# Altium PCB TK530_Kraftbakplan.PcbDoc
Units mm, origin at the board's own origin, x right, y up, seen from the top; angles counter-clockwise.
Board outline 200 x 100 mm, 2 copper layers (Top Layer, Bottom Layer), stack 3.071 mm thick; 35 components, 37 nets, 226 pads, 21 vias.
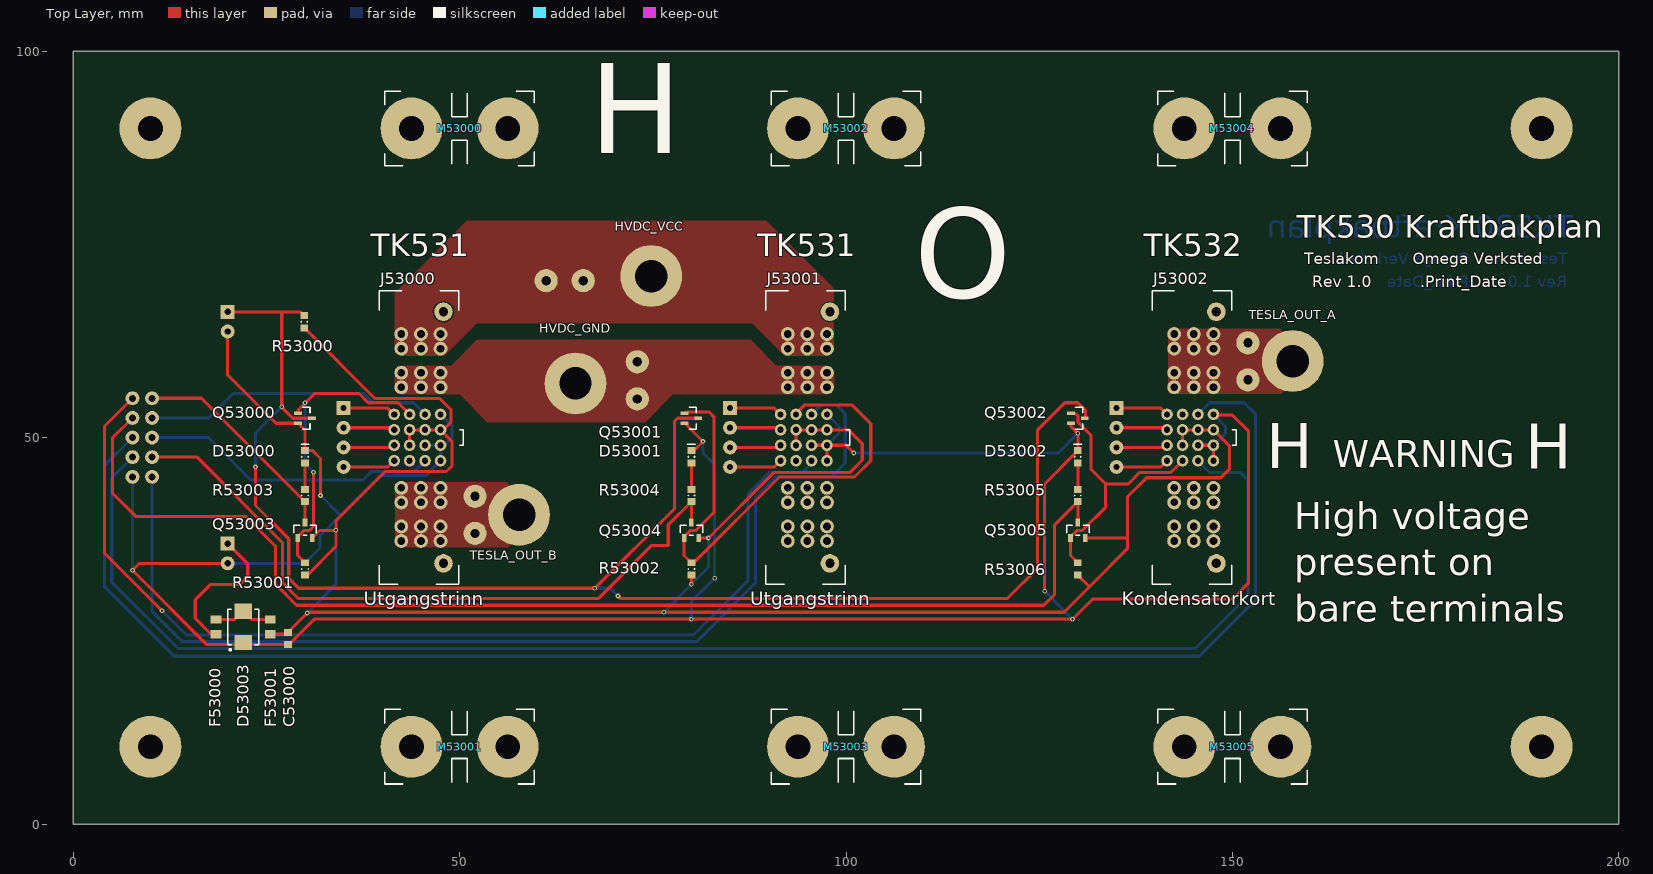
[diagram p0: Top Layer view]
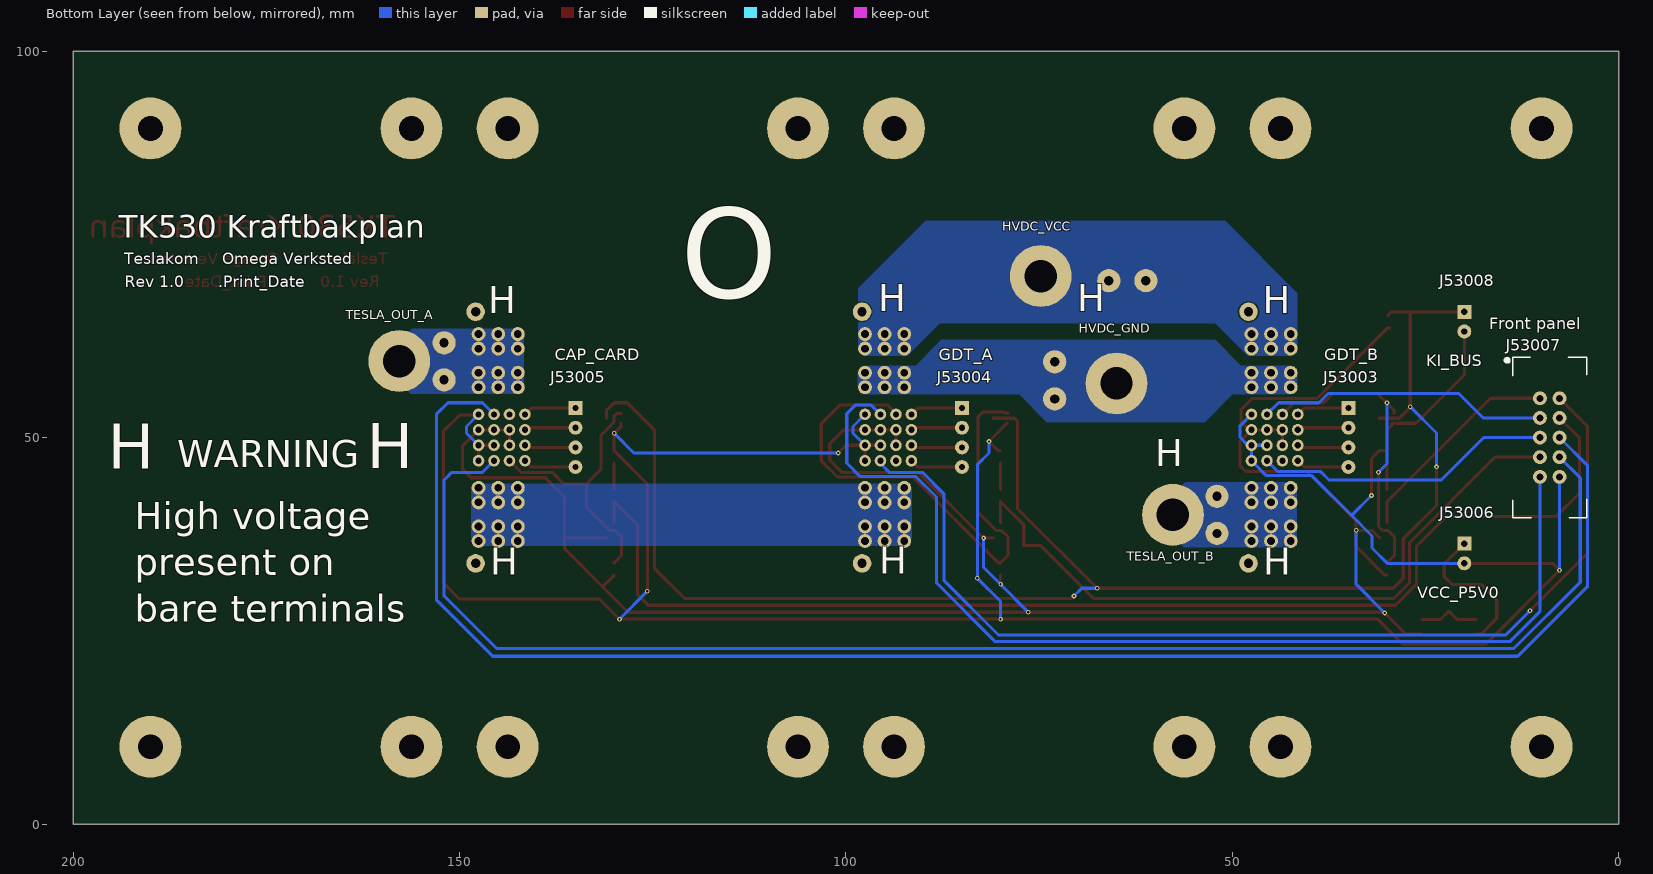
[diagram p1: Bottom Layer view, seen from below]
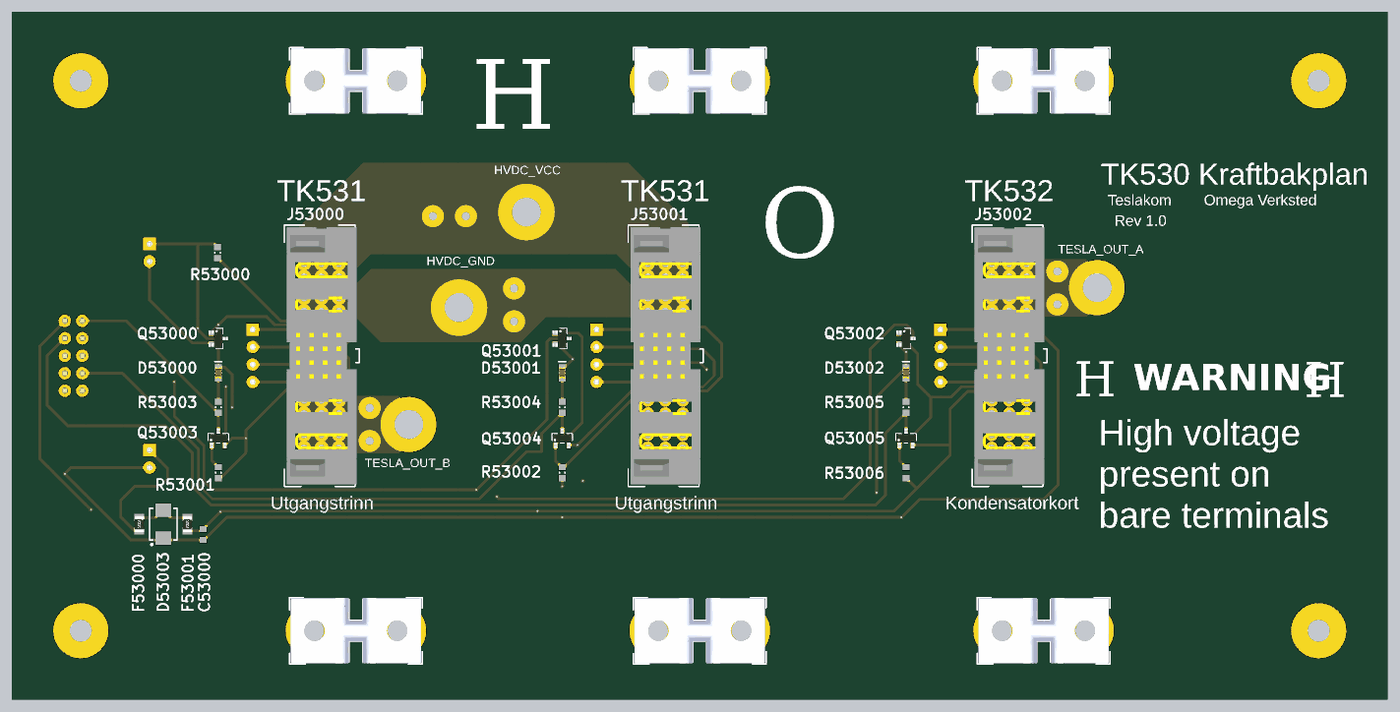
[diagram p2: 3D render of the assembled board from above, using the file's embedded part models]
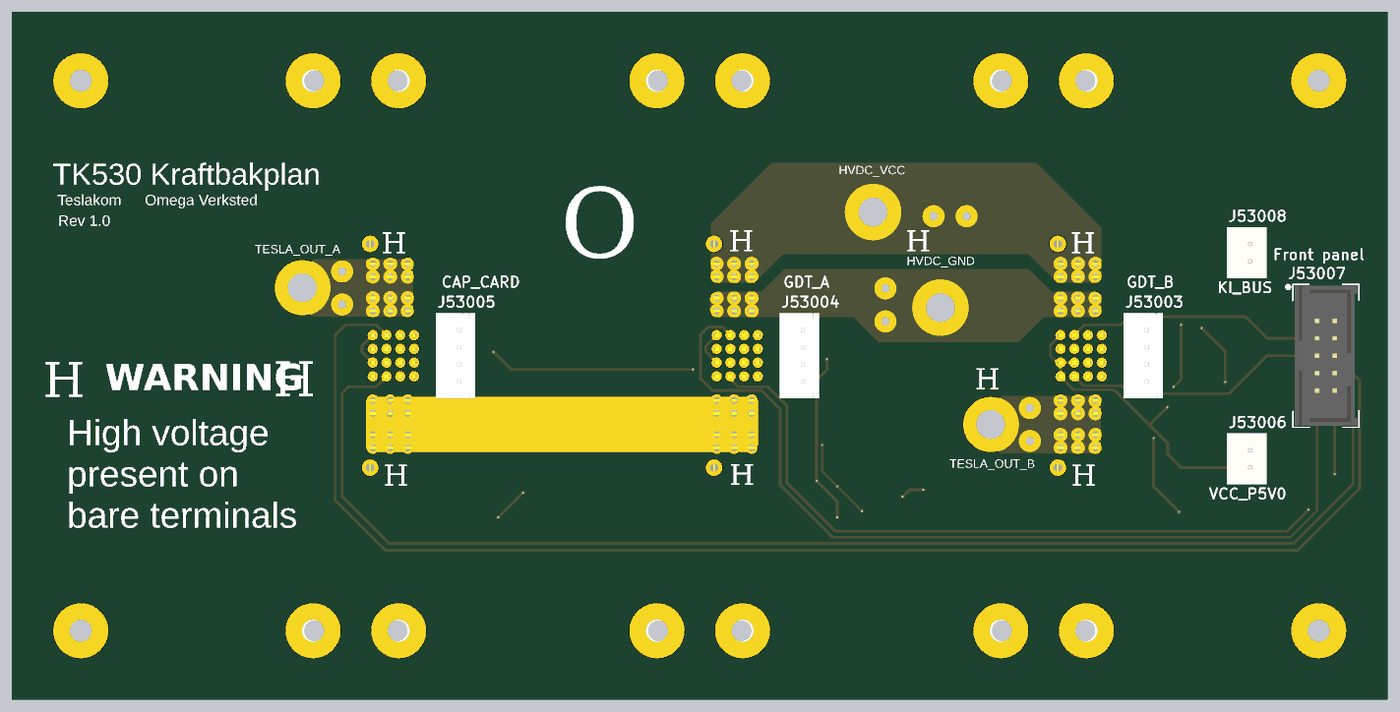
[diagram p3: 3D render of the assembled board from below, using the file's embedded part models]

## Layer stack, top to bottom
Top Solder: solder mask 0.0102, Solder Resist, Dk 3.5
Top Layer: signal copper 0.0356
Dielectric 1: dielectric 3, FR-4, Dk 4.8
Bottom Layer: signal copper 0.0356
Bottom Solder: solder mask 0.0102, Solder Resist, Dk 3.5

## Board outline
0,0 0,100 200,100 200,0 0,0

## Design rules (kind name [scope] priority, off if disabled: settings)
Clearance [All] p1: gap=0.16 ignorepadtopadclearanceinfootprint=FALSE except(0: Arc-Text Arc-Hole Track-Text Track-Hole SMDPad-Text SMDPad-Hole THPad-Text THPad-Hole Via-Text Via-Hole Fill-Text Fill-Hole Poly-Text Poly-Hole Region-Text Region-Hole Text-Text Text-Hole)
Height [All] p1: minheight=0 maxheight=200 prefheight=12.7
HoleSize [All] p1: absolutevalues=TRUE maxlimit=6.35 minlimit=0.3 maxpercent=80.000 minpercent=20.000
MinimumSolderMaskSliver [All] p1: minsoldermaskwidth=0.1
PlaneClearance [All] p1: clearance=1
PlaneConnect [All] p1: planeconnectstyle=Relief reliefexpansion=0.508 reliefentries=4 reliefconductorwidth=1 reliefairgap=0.254
PolygonConnect [All] p1: connectstyle=Direct reliefconductorwidth=0.254 reliefentries=4 polygonreliefangle="90 Angle" airgapwidth=0.254
RoutingVias [All] p1: holewidth=0.711 width=1.27 viastyle="Through Hole" minholewidth=0.711 minwidth=1.27 maxholewidth=0.711 maxwidth=1.27
SilkToSolderMaskClearance [IsPad] p1: minsilkscreentomaskgap=0.178 clearancetoexposedcopper=TRUE
SolderMaskExpansion [All] p1: expansion=0.102 istentingtop=FALSE
Width [All] p1: maxlimit=10 minlimit=0.16 preferedwidth=0.4
24 further rules are at their usual default settings.

## Components (designator, comment, footprint, x,y, rotation, side; value= is the part's Value field where it differs from the comment)
C53000 "100nF" CAPC0603(1608)55_N 27.8,24 r90 top
D53000 "SMD LED Red" I_LEDC0603(1608)_N 30,47.5 r90 top
D53001 "SMD LED Red" I_LEDC0603(1608)_N 80,47.5 r90 top
D53002 "SMD LED Red" I_LEDC0603(1608)_N 130,47.5 r90 top
D53003 "SMBJ5.0A-TR" SODFL535X245-2N 22,25.5 r90 top
F53000 "MC36214" RESC0805(2012)_N 18.5,25.5 r90 top
F53001 "MC36214" RESC0805(2012)_N 25.5,25.5 r270 top
J53000 "MPXX-02-16-02" MPSC-02-16-02-7.70-03-L-V-LC 45,50 r0 top
J53001 "MPXX-02-16-02" MPSC-02-16-02-7.70-03-L-V-LC 95,50 r0 top
J53002 "MPXX-02-16-02" MPSC-02-16-02-7.70-03-L-V-LC 145,50 r0 top
J53003 "B4B-XH-A (LF)(SN)" JST_4P 35,50 r0 bottom
J53004 "B4B-XH-A (LF)(SN)" JST_4P 85,50 r0 bottom
J53005 "B4B-XH-A (LF)(SN)" JST_4P 135,50 r0 bottom
J53006 "B2B-XH-A (LF)(SN)" JST_2P 20,35 r0 bottom
J53007 "Header2x5" HDRV10W64P254_2X5_2030X900X900B 8.95,50 r180 bottom
J53008 "B2B-XH-A (LF)(SN)" JST_2P 20,65 r0 bottom
M53000 "CardHolder" CardHolder900X1900X5000 50,90 r90 top
M53001 "CardHolder" CardHolder900X1900X5000 50,10 r90 top
M53002 "CardHolder" CardHolder900X1900X5000 100,90 r90 top
M53003 "CardHolder" CardHolder900X1900X5000 100,10 r90 top
M53004 "CardHolder" CardHolder900X1900X5000 150,90 r90 top
M53005 "CardHolder" CardHolder900X1900X5000 150,10 r90 top
Q53000 "2N7002" SOT323_N 30,52.5 r90 top
Q53001 "2N7002" SOT323_N 80,52.5 r90 top
Q53002 "2N7002" SOT323_N 130,52.5 r90 top
Q53003 "BSH201" SOT23-3_N 30,38 r180 top
Q53004 "BSH201" SOT23-3_N 80,38 r180 top
Q53005 "BSH201" SOT23-3_N 130,38 r180 top
R53000 "10k" RESC0603(1608)_N 29.9,65 r270 top
R53001 "10k" RESC0603(1608)_N 30,33 r270 top
R53002 "10k" RESC0603(1608)_N 80,33 r270 top
R53003 "47R" RESC0603(1608)_N 30,42.5 r270 top
R53004 "47R" RESC0603(1608)_N 80,42.5 r270 top
R53005 "47R" RESC0603(1608)_N 130,42.5 r270 top
R53006 "10k" RESC0603(1608)_N 130,33 r270 top

## Footprints (in the part's own frame and the unit in brackets; to place one, negate y for a bottom-side part, rotate by r counter-clockwise, add the part's x,y. Pads: shape width x height; smd on the part's side, far side on the other; paste and mask are expansions set on the pad)
CAPC0603(1608)55_N [mm] "Chip Capacitor, Body 1.6x0.8mm, Height 0.55mm, IPC Medium Density"
  rect 0.9x1 smd: 1(-0.8,0) 2(0.8,0)
  body extent -0.87,-0.48 0.88,0.47, height 0.55
CardHolder900X1900X5000 [mm]
  round 8 hole 3.2: 0(0,6.223) 0(0,-6.223)
  silkscreen extent -4.83,-9.65 4.83,9.65, body extent -4.75,-9.5 4.75,9.5, height 50
HDRV10W64P254_2X5_2030X900X900B [mm]
  round 1.8 hole 0.9: 1(-1.27,5.08) 2(1.27,5.08) 3(-1.27,2.54) 4(1.27,2.54) 5(-1.27,0) 6(1.27,0) 7(-1.27,-2.54) 8(1.27,-2.54) 9(-1.27,-5.08) 10(1.27,-5.08)
  silkscreen extent -5.7,-10.4 4.8,10.4, body extent -4.57,-10.16 4.57,10.16, height 9.86
I_LEDC0603(1608)_N [mm] "Chip Resistor, Body 1.6x0.8mm, IPC Medium Density"
  rect 0.9x1 smd: 1(-0.8,0) 2(0.8,0)
  silkscreen extent -0.05,-0.51 1.65,0.51, body extent -0.85,-0.45 0.85,0.45, height 0.9
JST_2P [mm]
  rect 1.8x1.8 hole 0.8: 1(0,-1.27)
  round 1.8 hole 0.8: 2(0,1.27)
  body extent -2.4,-3.7 3.35,3.7, height 7
JST_4P [mm]
  rect 1.8x1.8 hole 0.8: 1(0,-3.81)
  round 1.8 hole 0.8: 2(0,-1.27) 3(0,1.27) 4(0,3.81)
  body extent -2.35,-6.2 3.4,6.2, height 7
MPSC-02-16-02-7.70-03-L-V-LC [mm] "SAMTEC"
  round 2.4 hole 1.2 unplated: 0(2.92,-16.275) 0(2.92,16.275)
  round 1.8 hole 1: 1(-2.54,11.505) 1(-2.54,13.385) 1(0,11.505) 1(0,13.385) 1(2.54,11.505) 1(2.54,13.385) 2(-2.54,6.505) 2(-2.54,8.385) 2(0,6.505) 2(0,8.385) 2(2.54,6.505) 2(2.54,8.385) 3(-2.54,-8.385) 3(-2.54,-6.505) 3(0,-8.385) 3(0,-6.505) 3(2.54,-8.385) 3(2.54,-6.505) 4(-2.54,-13.385) 4(-2.54,-11.505) 4(0,-13.385) 4(0,-11.505) 4(2.54,-13.385) 4(2.54,-11.505)
  round 1.5 hole 0.8: 5(2.54,3) 6(2.54,1) 7(2.54,-1) 8(2.54,-3) 9(0.54,3) 10(0.54,1) 11(0.54,-1) 12(0.54,-3) 13(-1.46,3) 14(-1.46,1) 15(-1.46,-1) 16(-1.46,-3) 17(-3.46,3) 18(-3.46,1) 19(-3.46,-1) 20(-3.46,-3)
  silkscreen extent -5.4,-19 5.5,19, body extent -5.08,-18.72 5.08,18.72, height 10.24
RESC0603(1608)_N [mm] "Chip Resistor, Body 1.6x0.8mm, IPC Medium Density"
  rect 0.9x1 smd: 1(-0.8,0) 2(0.8,0)
  silkscreen extent -0.05,-0.4 0.05,0.4, body extent -0.85,-0.47 0.85,0.47, height 0.6
RESC0805(2012)_N [mm] "Chip Resistor, Body 2.0x1.3mm, IPC Medium Density"
  rect 1.05x1.4 smd: 1(-0.95,0) 2(0.95,0)
  body extent -1.15,-0.67 1.15,0.68, height 0.76
SODFL535X245-2N [mm] "SODFL, 2-Leads, Body 3,63x5,35mm, IPC Medium Density"
  rect 1.95x2.25 smd: 1(-2.025,0) 2(2.025,0)
  silkscreen extent -3.07,-2 2.3,2, body extent -2.3,-1.97 2.3,1.97, height 2.45
SOT23-3_N [mm] "SOT23, 3-Leads, Body 1.3x2.9mm, Pitch 0.95mm"
  rect 0.6x1 smd paste-0.05: 1(0.95,1) 2(-0.95,1) 3(0,-1)
  silkscreen extent -1.45,-0.65 1.45,0.65, body extent -1.45,-1.4 1.45,1.4, height 1.3
SOT323_N [mm] "SOT23, 3-Leads, Body 1.3x2.9mm, Pitch 0.95mm"
  rect 0.5x1 smd paste-0.05: 1(0.65,0.9) 2(-0.65,0.9) 3(0,-0.9)
  silkscreen extent -1.45,-0.65 1.45,0.3, body extent -1.45,-1.4 1.45,1.4, height 1.3

## Part data
C53000: library part 5152, "X7R 50V 5%", antall=1000, dybde=0, hylle=0, id=5152, komponenttype=2, lager_type=Baklager, leverandor=Farnell, leverandor_varenr=1759122, navn=100nF, nokkelord="Kondensator, Capacitor, CAP", pakke_opprettet="18/02/2015 14:18:13", pakke_opprettet_av=815, pakketype=0603, pris=1, produsent=Multicomp, rad=21, rom=OV, symbol_opprettet="14/11/2014 20:19:34", symbol_opprettet_av=815
D53000 D53001 D53002: library part 5143, "SMD", antall=50, dybde=2, hylle=6, id=5143, komponenttype=9, lager_type=Fremlager, leverandor=Farnell, leverandor_varenr=8554641, navn="SMD LED Red", nokkelord=SMD, pakke_opprettet="06/07/2014 18:55:44", pakke_opprettet_av=815, pakketype=0603, pris=1, produsent=Avago, rad=0, rom=OV, symbol_opprettet="06/07/2014 18:59:47", symbol_opprettet_av=815
D53003: library part 5314, "Transient Voltage Suppressor, TVS, Transil SMBJ Series, Unidirectional, 5 V, SMD, 2, 6.4 V", id=5314, komponenttype=9, leverandor=Farnell, leverandor_varenr=9886311, navn=SMBJ5.0A-TR, pakke_opprettet="14/03/2016 19:17:15", pakke_opprettet_av=815, pakketype=SMD, pris=1, produsent="ST Microelectronics", symbol_opprettet="28/06/2014 15:19:53", symbol_opprettet_av=815
F53000 F53001: library part 5311, "FUSE, PTC RESET, SMD, 16V, 500MA", id=5311, leverandor=Farnell, leverandor_varenr=1861181, navn=MC36214, pakke_opprettet="27/01/2016 14:23:16", pakke_opprettet_av=815, pakketype=0805, pris=2, produsent=Multicomp, symbol_opprettet="11/03/2016 15:38:25", symbol_opprettet_av=815
J53000 J53001 J53002: library part 3220, "SAMTEC Connector", id=3220, komponenttype=11, leverandor=Mouser, leverandor_varenr=MPSC-02-16-02-7.70-03-L-V-LC, navn=MPSC-02-16-02-7.70-03-L-V-LC, nokkelord="Kan kjøpes rett fra SAMTEC", pakke_opprettet="13/07/2014 16:35:38", pakke_opprettet_av=815, pakketype=TH, pris=30, produsent=SAMTEC, symbol_opprettet="13/07/2014 16:35:21", symbol_opprettet_av=815
J53003 J53004 J53005: library part 3046, "JST 4pin (pris pr. stk.)", antall=94, dybde=0, hylle=6, id=3046, komponenttype=11, lager_type=Fremlager, leverandor=Farnell, leverandor_varenr=1516278, navn="B4B-XH-A (LF)(SN)", nokkelord="Connector, Kontakt", pakke_opprettet="28/06/2014 18:25:23", pakke_opprettet_av=815, pakketype=TH, pris=2, produsent=JST, rad=3, rom=OV, symbol_opprettet="28/06/2014 15:33:28", symbol_opprettet_av=815
J53006 J53008: library part 4043, "JST 2pin (pris pr. stk.)", antall=120, dybde=0, hylle=6, id=4043, komponenttype=11, lager_type=Fremlager, leverandor=Farnell, leverandor_varenr=1516276, navn="B2B-XH-A (LF)(SN)", nokkelord="Connector, Kontakt", pakke_opprettet="28/06/2014 18:25:03", pakke_opprettet_av=815, pakketype=TH, pris=2, produsent=JST, rad=3, rom=OV, symbol_opprettet="28/06/2014 15:33:17", symbol_opprettet_av=815
J53007: library part 3224, "Header", id=3224, komponenttype=11, leverandor=Farnell, leverandor_varenr=2215304, navn="Header 2X5 Shrouded", nokkelord=Header, pakke_opprettet="12/07/2014 17:42:52", pakke_opprettet_av=815, pakketype=TH, pris=5, produsent=Amphenol, symbol_opprettet="13/11/2014 11:03:55", symbol_opprettet_av=815
M53000 M53001 M53002 M53003 M53004 M53005: library part 4028, "Støtter kort i bakplan", id=4028, navn="KortStøtte 50mm", nokkelord="support, cardholder, kortholder", pakke_opprettet="25/03/2017 04:47:31", pakke_opprettet_av=815, pakketype=TH, pris=5, symbol_opprettet="12/07/2014 20:29:53", symbol_opprettet_av=815
Q53000 Q53001 Q53002: library part 3075, "N-Channel MOSFET 300mA", antall=810, dybde=0, hylle=3, id=3075, komponenttype=4, lager_type=Fremlager, leverandor=Farnell, leverandor_varenr=1829184, navn=2N7002, pakke_opprettet="12/05/2018 20:42:12", pakke_opprettet_av=1165, pakketype=SOT-323, pris=1, rad=2, rom=OV, symbol_opprettet="11/07/2014 23:17:04", symbol_opprettet_av=774
Q53003 Q53004 Q53005: library part 3085, "P-Channel MOSFET 300mA", antall=51, dybde=0, hylle=3, id=3085, komponenttype=4, lager_type=Fremlager, leverandor=Farnell, leverandor_varenr=1758073, navn=BSH201, pakke_opprettet="08/07/2014 20:37:25", pakke_opprettet_av=815, pakketype=SOT, pris=3, produsent="NXP Semiconductors", rad=3, rom=OV, Status=New, symbol_opprettet="14/09/2016 17:47:57", symbol_opprettet_av=1150
R53000 R53001 R53002 R53006: library part 5264, "0.1W 1% Thick film resistor", antall=4, dybde=72, hylle=2, id=5264, komponenttype=1, lager_type=Fremlager, leverandor=Farnell, leverandor_varenr=2447230, navn=10k, nokkelord="Resistor Motstand", pakke_opprettet="08/07/2014 21:15:30", pakke_opprettet_av=815, pakketype=0603, pris=0, produsent=Multicomp, rad=0, rom=OV, symbol_opprettet="08/07/2014 21:16:33", symbol_opprettet_av=815
R53003 R53004 R53005: library part 4889, "0.1W 1% Thick film resistor", antall=195, dybde=16, hylle=2, id=4889, komponenttype=1, lager_type=Fremlager, leverandor=Farnell, leverandor_varenr=2447378, navn=47R, nokkelord=Resistor, pakke_opprettet="08/07/2014 21:15:30", pakke_opprettet_av=815, pakketype=0603, pris=0, produsent=Multicomp, rad=0, rom=OV, symbol_opprettet="08/07/2014 21:16:33", symbol_opprettet_av=815

## Free pads (board coordinates)
  round 8 hole 3.2 unplated: 0(10,10) 0(10,90) 0(190,10) 0(190,90)
  round 3 hole 1.2: 1(52,37.6) 1(52,42.4) 1(61.2,70.3) 1(66,70.3) 1(73,55) 1(73,59.8) 1(152,57.463) 1(152,62.263)
  round 8 hole 4.2: 1(57.7,40) 1(65,57) 1(74.8,70.9) 2(157.8,59.9)

## Via types
v1: diameter 0.6, hole 0.3, Top Layer to Bottom Layer, tented both sides, 21 vias

## Nets (pads, with @x,y where several pads share a name; then routed paths per layer and width w, separated by ;. In a path a pad name is that pad's centre, name@x,y a point inside that pad or via, vN(x,y) a via of type N, cw(c..) or ccw(c..) an arc to the next point about the centre after c; other vN are vias at no path point)
GDT_A1: J53000.18 J53003.2 | length 6.7
  Top Layer w0.4: J53003.2 41.27,51.27 J53000.18
GDT_A2: J53000.20 J53003.4 | length 6.9
  Top Layer w0.4: J53003.4 40.73,46.19 J53000.20
GDT_A3: J53001.18 J53004.2 | length 6.7
  Top Layer w0.4: J53004.2 91.27,51.27 J53001.18
GDT_A4: J53001.20 J53004.4 | length 6.9
  Top Layer w0.4: J53004.4 90.73,46.19 J53001.20
GDT_B1: J53000.17 J53003.1 | length 6.9
  Top Layer w0.4: J53003.1 40.73,53.81 J53000.17
GDT_B2: J53000.19 J53003.3 | length 6.7
  Top Layer w0.4: J53003.3 41.27,48.73 J53000.19
GDT_B3: J53001.17 J53004.1 | length 6.9
  Top Layer w0.4: J53004.1 90.73,53.81 J53001.17
GDT_B4: J53001.19 J53004.3 | length 6.7
  Top Layer w0.4: J53004.3 91.27,48.73 J53001.19
GND: C53000.1 D53000.2 D53001.2 D53002.2 D53003.1 J53000.5 J53000.7 J53000.8 J53000.11 J53001.5 J53001.7 J53001.8 J53001.11 J53002.5 J53002.7 J53002.8 J53002.11 J53006.2 J53007.10 J53008.2 Q53000.2 Q53001.2 Q53002.2 | length 388.5
  Top Layer w0.4: J53006.2 8.59,33.73 v1(7.68,32.82) 17.3,23.2 27.9,23.2 31.2,26.5 v1(80,26.5) v1(129.3,26.5) 131.9,29.1 150,29.1 152.1,31.2 152.1,50.8 150,52.9 147.64,52.9 J53002.5 ; J53008.2 20,58.1 26.25,51.85 Q53000.2@28.7,51.85 ; Q53000.2 29.35,51.85 29.4,51.8 29.4,51.55 30,50.95 D53000.2 31,48.3 32,47.3 v1(32,42.5) ; Q53001.2@79.125,51.875 v1(81.5,49.5) 80.3,48.3 D53001.2 ; J53001.11 J53001.7 ; J53001.8 J53001.7 ; v1(101,48) 100,49 J53001.7 ; v1(125.7,30.1) 125.7,44 D53002.2 v1(130,50.55) 129.1,51.45 Q53002.2 ; J53002.11 J53002.7 J53002.8
  Bottom Layer w0.4: v1(7.68,32.82) J53007.10 ; J53006.2 29.97,33.73 31.94,35.7 31.94,37.278 ; 32,37.338 34.6,39.938 ; v1(32,42.5) 34.562,39.938 34.6,39.938 ; J53000.11 J53000.7 ; J53000.5 49,51.54 49,50 48,49 J53000.7 ; v1(80,26.5) 80,28.8 v1(83,31.8) 83,46.5 81.5,48 v1(81.5,49.5) ; J53001.7 99.1,50.56 99.1,51.44 J53001.5 ; v1(101,48) 127.45,48 v1(130,50.55) ; v1(125.7,30.1) v1(129.3,26.5) ; J53002.7 149.1,50.56 149.1,51.44 J53002.5 ; 34.6,39.938 39.732,45.07 45.61,45.07 J53000.8 J53000.7
HVDC_GND: J53000.2 J53001.2 pad.1@65,57 pad.1@73,55 pad.1@73,59.8
HVDC_VCC: J53000.1 J53001.1 pad.1@61.2,70.3 pad.1@66,70.3 pad.1@74.8,70.9
KORT_INNSATT: J53008.1 Q53000.3 Q53001.3 Q53002.3 R53000.1 | length 208.2
  Top Layer w0.4: J53008.1 27,66.27 ; v1(23.6,46.2) 23.6,41.2 27.9,36.9 27.9,31.8 29.2,30.5 v1(67.5,30.5) 77.8,40.8 77.8,52.1 78.2,52.5 Q53001.3@81,52.5 ; R53000.1 29.43,66.27 27,66.27 ; Q53000.3@31,52.5 28.4,52.5 27,53.9 v1(27,54) 27,66.27 ; v1(70.5,29.5) 70.8,29.2 120.9,29.2 124.8,33.1 124.8,51 128.3,54.5 130,54.5 131,53.5 Q53002.3@131,52.5
  Bottom Layer w0.4: v1(23.6,46.2) 23.6,50.6 v1(27,54) ; v1(67.5,30.5) 69.5,30.5 v1(70.5,29.5)
NetD53000_1: D53000.1 R53003.1 | length 3.4
  Top Layer w0.4: R53003.1 D53000.1
NetD53001_1: D53001.1 R53004.1 | length 3.4
  Top Layer w0.4: R53004.1 D53001.1
NetD53002_1: D53002.1 R53005.1 | length 3.4
  Top Layer w0.4: R53005.1 D53002.1
NetD53003_2: D53003.2 F53000.2 F53001.1 | length 7.9
  Top Layer w0.4: F53000.2 20.925,26.45 D53003.2 23.075,26.45 F53001.1
NetF53000_1: F53000.1 J53006.1 | length 19.3
  Top Layer w0.4: F53000.1 17.85,24.55 15.8,26.6 15.8,29 17.8,31 21.6,31 22.6,32 22.6,33.67 J53006.1
NetJ53000_13: J53000.13 Q53000.1 Q53003.1 R53001.1 | length 39.7
  Top Layer w0.4: Q53000.1 29.1,53.55 31.25,55.7 37,55.7 38.2,54.5 42.04,54.5 J53000.13 ; R53001.1 29.05,34.75 Q53003.1 29.05,37.15 29.9,38 30.6,38 31.1,38.5 v1(31.1,45.5)
  Bottom Layer w0.4: v1(30,54.5) 30,46.6 v1(31.1,45.5)
NetJ53001_13: J53001.13 Q53001.1 Q53004.1 R53002.1 | length 70
  Top Layer w0.4: Q53001.1@79.034,53.2 79.4,53.2 79.5,53.3 82.3,53.3 82.9,52.7 82.9,40.3 80.6,38 79.9,38 Q53004.1@79.05,37.15 ; Q53004.1 79.05,34.75 R53002.1 80.3,33.8 91.4,44.9 101.1,44.9 103.2,47 103.2,51.8 100.8,54.2 94.6,54.2 93.54,53.14 J53001.13
NetJ53002_16: J53002.16 Q53002.1 Q53005.1 R53006.1 | length 35.2
  Top Layer w0.4: Q53005.1 129.05,34.75 R53006.1 ; Q53005.1@129.05,37.15 129.9,38 130.6,38 133.6,41 133.6,44 ; Q53002.1@129.1,53.1 129.7,53.1 130.04,52.76 130.04,51.96 131.7,50.3 131.7,45.9 133.6,44 ; J53002.16 142.04,45.5 138,45.5 136.5,44 133.6,44
NetJ53002_17: J53002.17 J53005.1 | length 6.9
  Top Layer w0.4: J53005.1 140.73,53.81 J53002.17
NetJ53002_18: J53002.18 J53005.2 | length 6.7
  Top Layer w0.4: J53005.2 141.27,51.27 J53002.18
NetJ53002_19: J53002.19 J53005.3 | length 6.7
  Top Layer w0.4: J53005.3 141.27,48.73 J53002.19
NetJ53002_20: J53002.20 J53005.4 | length 6.9
  Top Layer w0.4: J53005.4 140.73,46.19 J53002.20
S0_FEIL: J53000.9 J53007.3 | length 37.7
  Bottom Layer w0.4: J53007.3 17.54,52.54 20.7,55.7 37.6,55.7 38.8,54.5 44.04,54.5 J53000.9
S0_KI: J53007.1 Q53003.3 R53003.2 | length 28
  Top Layer w0.4: J53007.1 16.62,55.08 R53003.2 Q53003.3
S0_OK: J53000.12 J53007.5 | length 38.6
  Bottom Layer w0.4: J53007.5 17.5,50 23,44.5 37.5,44.5 38.63,45.63 44.17,45.63 J53000.12
S1_FEIL: J53001.9 J53007.9 | length 136.5
  Bottom Layer w0.4: J53007.9 10.22,27.48 14.1,23.6 80.7,23.6 88.3,31.2 88.3,42.3 90.94,44.94 98.14,44.94 99.9,46.7 99.9,53.1 98.8,54.2 96.74,54.2 J53001.9
S1_KI: J53007.7 Q53004.3 R53004.2 | length 89.8
  Top Layer w0.4: J53007.7 16.04,47.46 27.1,36.4 27.1,31.2 29.1,29.2 68,29.2 74.85,36.05 77,36.05 77,38.7 R53004.2 Q53004.3
S1_OK: J53001.12 J53007.2 | length 133.5
  Top Layer w0.4: J53007.2 4.04,51.44 4.04,35.06 v1(11.5,27.6)
  Bottom Layer w0.4: v1(11.5,27.6) 14.64,24.46 80.268,24.46 87.34,31.532 87.34,42.74 90.1,45.5 94.4,45.5 95.54,46.64 J53001.12
S2_FEIL: J53002.9 J53007.6 | length 209.2
  Bottom Layer w0.4: J53007.6 4.04,46.36 4.04,30.76 13.1,21.7 145.7,21.7 153,29 153,53 151.5,54.5 147.04,54.5 J53002.9
S2_KI: J53007.4 Q53005.3 R53005.2 | length 158.1
  Top Layer w0.4: J53007.4 5.1,49.96 5.1,42.8 8.1,39.8 22.3,39.8 26.2,35.9 26.2,31 28.9,28.3 125.6,28.3 127,29.7 127,36.05 127,38.7 R53005.2 Q53005.3
S2_OK: J53002.12 J53007.8 | length 193.1
  Bottom Layer w0.4: J53007.8 5,44.78 5,31.3 13.6,22.7 145.2,22.7 152,29.5 152,44.5 151,45.5 147.04,45.5 J53002.12
TESLA_OUT_A: J53002.1 J53002.2 pad.1@152,57.463 pad.1@152,62.263 pad.2
TESLA_OUT_B: J53000.3 J53000.4 pad.1@52,37.6 pad.1@52,42.4 pad.1@57.7,40
TESLA_OUT_TO_C: J53001.3 J53001.4 J53002.3 J53002.4
VCC_P5V0: C53000.2 F53001.2 J53000.6 J53000.10 J53000.14 J53000.15 J53001.6 J53001.10 J53001.14 J53001.15 J53002.6 J53002.10 J53002.14 J53002.15 Q53003.2 Q53004.2 Q53005.2 R53000.2 R53001.2 R53002.2 R53006.2 | length 289.4
  Top Layer w0.2: J53000.15@43.54,48.74 J53000.15
  Top Layer w0.4: F53001.2 27.55,24.55 C53000.2 30.4,27.4 v1(76.4,27.4) 128.2,27.4 131.5,30.7 ; R53000.2@29.6,64.2 R53000.2 39.04,55.06 47.44,55.06 48.9,53.6 48.9,52 47.9,51 J53000.6 ; R53001.2 30.3,32.2 34,35.9 v1(34,38) ; Q53003.2 31.95,38 v1(34,38) ; J53000.15 J53000.14 J53000.10 J53000.6 ; v1(80,31) R53002.2 ; Q53004.2 v1(82.2,37) 90.66,45.46 100.468,45.46 102.1,47.092 102.1,49.2 100.3,51 J53001.6 J53001.10 J53001.14 J53001.15 ; R53006.2 131.5,30.7 ; Q53005.2 136.4,37 ; J53002.15 J53002.14 J53002.10 J53002.6 149.6,48.94 149.6,45.9 148.5,44.8 138.9,44.8 136.4,42.3 136.4,37 ; v1(34,38) 34,39.2 40.4,45.6 48.3,45.6 49,46.3 49,49.54 J53000.6 ; 131.5,30.7 136.4,35.6 136.4,37
  Bottom Layer w0.4: v1(30.3,27.3) 34,31 v1(34,38) ; v1(76.4,27.4) v1(80,31) 82.2,33.2 v1(82.2,37)
pads on no net: J53000.0 J53000.16 J53001.0 J53001.16 J53002.0 J53002.13 M53000.0 M53001.0 M53002.0 M53003.0 M53004.0 M53005.0

## Polygon pours and split planes (outlines as drawn)
HVDC_VCC on Bottom Layer "TESLA_OUT_B" (solid, pour order 19): 47.5,60.6 42.5,60.6 41.6,61.5 41.6,63.5 41.6,68.7 50.95,78.05 89.65,78.05 98.4,69.3 98.4,63.4 98.4,61.5 98.4,61.4 97.6,60.6 92.5,60.6 92.1,60.6 87.9,64.8 52.2,64.8 48,60.6 42.5,60.6
TESLA_OUT_TO_C on Bottom Layer "TESLA_OUT_TO_C" (solid, pour order 11): 92.5,36 91.5,37 91.5,43.5 92,44 92.5,44 148,44 148.5,43.5 148.5,36.5 148,36 147.5,36 92.5,36
TESLA_OUT_B on Bottom Layer "TESLA_OUT_B" (solid, pour order 15): 42.5,44.2 42.4,44.2 41.7,43.5 41.7,36.5 42.4,35.8 47.6,35.8 56.3,35.8 58,37.5 58,42.3 56.1,44.2
TESLA_OUT_A on Bottom Layer "TESLA_OUT_B" (solid, pour order 14): 142.5,64.09 142.4,64.09 141.7,63.39 141.7,56.39 142.4,55.69 147.6,55.69 156.3,55.69 158,57.39 158,62.19 156.1,64.09
HVDC_GND on Bottom Layer "TESLA_OUT_B" (solid, pour order 17): 74,52 53.6,52 50,55.6 42.5,55.6 41.6,56.5 41.6,58.5 42.4,59.3 42.5,59.3 47.6,59.3 48.9,59.3 52.25,62.65 87.65,62.65 91,59.3 97.5,59.3 97.6,59.3 98.5,58.4 98.5,57.1 98.5,56.6 97.5,55.6 77.6,55.6
HVDC_GND on Top Layer "TESLA_OUT_B" (solid, pour order 16): 74,52 53.6,52 50,55.6 42.5,55.6 41.6,56.5 41.6,58.5 42.4,59.3 42.5,59.3 47.6,59.3 48.9,59.3 52.25,62.65 87.65,62.65 91,59.3 97.5,59.3 97.6,59.3 98.5,58.4 98.5,57.1 98.5,56.6 97.5,55.6 77.6,55.6
TESLA_OUT_B on Top Layer "TESLA_OUT_B" (solid, pour order 13): 42.5,44.2 42.4,44.2 41.7,43.5 41.7,36.5 42.4,35.8 47.6,35.8 56.3,35.8 58,37.5 58,42.3 56.1,44.2
TESLA_OUT_A on Top Layer "TESLA_OUT_B" (solid, pour order 12): 142.5,64.09 142.4,64.09 141.7,63.39 141.7,56.39 142.4,55.69 147.6,55.69 156.3,55.69 158,57.39 158,62.19 156.1,64.09
HVDC_VCC on Top Layer "TESLA_OUT_B" (solid, pour order 18): 47.5,60.6 42.5,60.6 41.6,61.5 41.6,63.5 41.6,68.7 50.95,78.05 89.65,78.05 98.4,69.3 98.4,63.4 98.4,61.5 98.4,61.4 97.6,60.6 92.5,60.6 92.1,60.6 87.9,64.8 52.2,64.8 48,60.6 42.5,60.6
no net on Bottom Solder "TESLA_OUT_TO_C" (solid, pour order 10): 92.5,36 91.5,37 91.5,43.5 92,44 92.5,44 148,44 148.5,43.5 148.5,36.5 148,36 147.5,36 92.5,36

## Other copper
Top Layer:
  text "TK530 Kraftbakplan" at 158.3,74.9 h5
  text "Teslakom" at 159.3,71.9 h2.5
  text "Omega Verksted" at 173.3,71.9 h2.5
  text "Rev 1.0" at 160.3,68.9 h2.5
  text ".Print_Date" at 174.3,68.9 h2.5
  text "O" at 108.8,64.3 h20
Bottom Layer:
  text "TK530 Kraftbakplan" at 194.1,74.9 h5
  text "Omega Verksted" at 180.7,71.9 h2.5
  text "Teslakom" at 193.4,71.9 h2.5
  text ".Print_Date" at 181.2,68.9 h2.5
  text "Rev 1.0" at 193.3,68.9 h2.5
  text "O" at 108.8,64.3 h20

## Silkscreen, mask and mechanical layers (free items; w line width, h text height)
Top Overlay:
  text "H" at 66.8,83 h20
  text "HVDC_VCC" at 70.1,76.4 h2
  text "TK530 Kraftbakplan" at 158.3,74.9 h5
  text "TK531" at 38.5,72.5 h5
  text "TK531" at 88.5,72.5 h5
  text "TK532" at 138.5,72.5 h5
  text "Teslakom" at 159.3,71.9 h2.5
  text "Omega Verksted" at 173.3,71.9 h2.5
  text "Rev 1.0" at 160.3,68.9 h2.5
  text ".Print_Date" at 174.3,68.9 h2.5
  text "TESLA_OUT_A" at 152.1,64.9 h2
  text "O" at 108.8,64.3 h20
  text "HVDC_GND" at 60.3,63.2 h2
  text "WARNING" at 163,45 h6
  text "H" at 154.4,44.1 h10
  text "H" at 187.9,44 h10
  text "High voltage" at 158,37 h6
  text "TESLA_OUT_B" at 51.3,33.8 h2
  text "present on" at 158,31 h6
  text "Utgangstrinn" at 37.6,27.7 h3
  text "Utgangstrinn" at 87.6,27.7 h3
  text "Kondensatorkort" at 135.7,27.7 h3
  text "bare terminals" at 158,25 h6
Bottom Overlay:
  text "HVDC_VCC" at 79.8,76.4 h2
  text "TK530 Kraftbakplan" at 194.1,74.9 h5
  text "Omega Verksted" at 180.7,71.9 h2.5
  text "Teslakom" at 193.4,71.9 h2.5
  text ".Print_Date" at 181.2,68.9 h2.5
  text "Rev 1.0" at 193.3,68.9 h2.5
  text "H" at 70.1,65.2 h6
  text "H" at 95.8,65.2 h6
  text "H" at 46.1,64.9 h6
  text "H" at 146.3,64.9 h6
  text "TESLA_OUT_A" at 164.7,64.9 h2
  text "O" at 108.8,64.3 h20
  text "Front panel" at 16.8,64 h1.52
  text "HVDC_GND" at 69.9,63.2 h2
  text "GDT_B" at 38.1,60 h1.52
  text "GDT_A" at 88,60 h1.52
  text "CAP_CARD" at 137.7,60 h1.52
  text "KI_BUS" at 24.9,59.2 h1.52
  text "H" at 60,45.1 h6
  text "WARNING" at 186.5,45 h6
  text "H" at 162,44.1 h10
  text "H" at 195.5,44 h10
  text "High voltage" at 192,37 h6
  text "TESLA_OUT_B" at 63.7,33.7 h2
  text "H" at 95.7,31.2 h6
  text "H" at 46,31.1 h6
  text "H" at 146,31.1 h6
  text "present on" at 192,31 h6
  text "VCC_P5V0" at 26.1,29.2 h1.52
  text "bare terminals" at 192,25 h6
Mechanical 1:
  the board outline again, w0.2